# Altium PCB main board_PCB.PcbDoc
Units mm, origin at the board's own origin, x right, y up, seen from the top; angles counter-clockwise.
Board outline 130 x 45 mm, 2 copper layers (Top Layer, Bottom Layer); 83 components, 61 nets, 365 pads, 31 vias.
Unrouted connection lines stored in the file: 11.
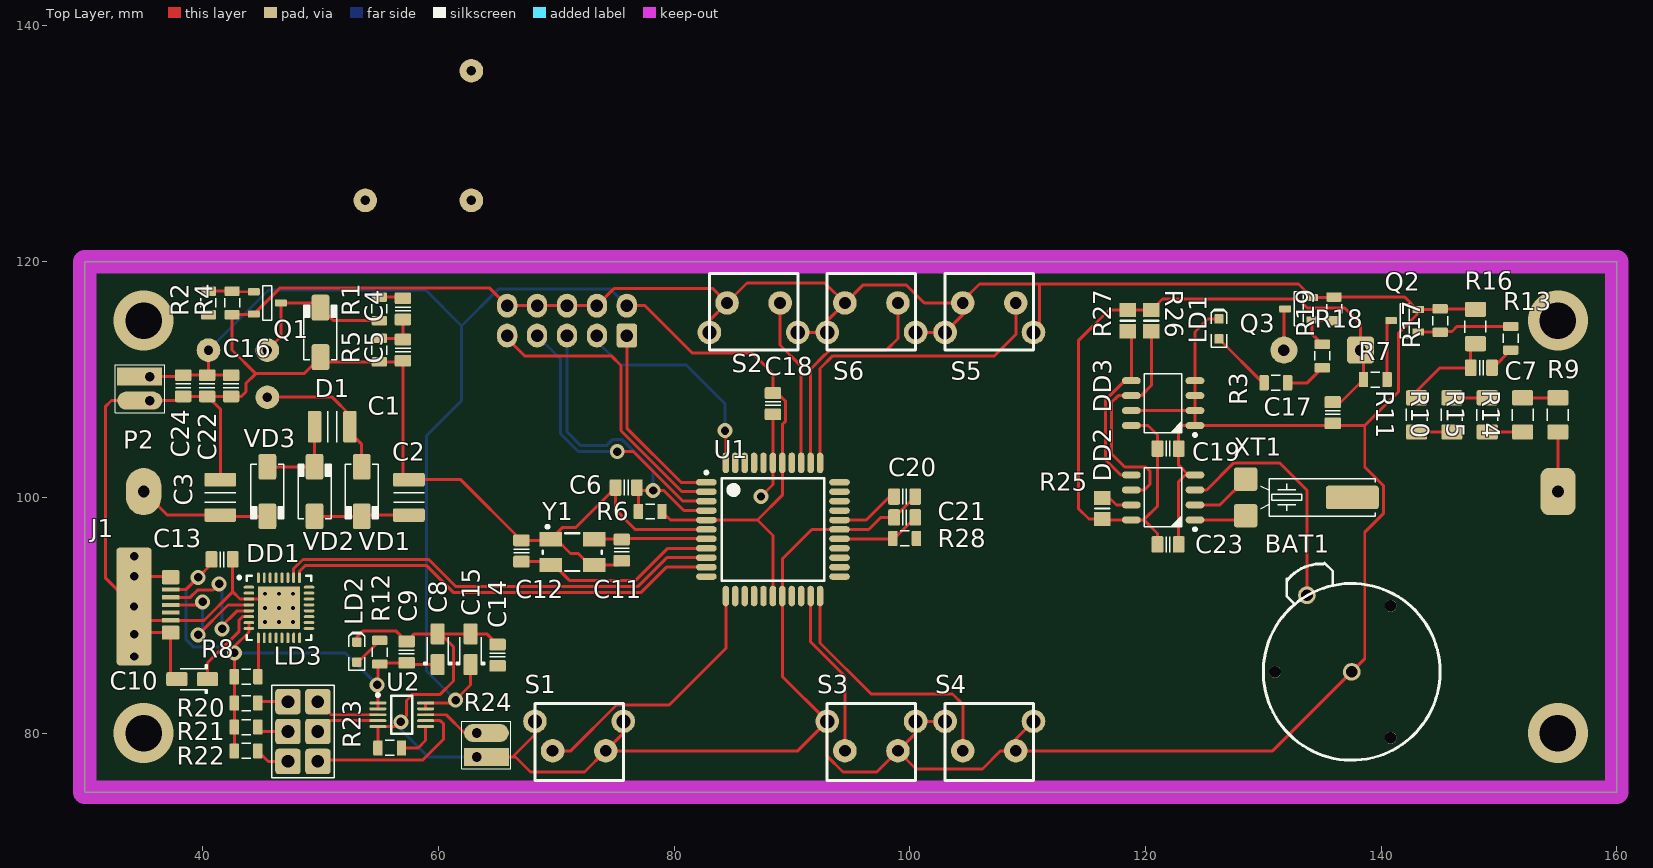
[diagram p0: Top Layer view]
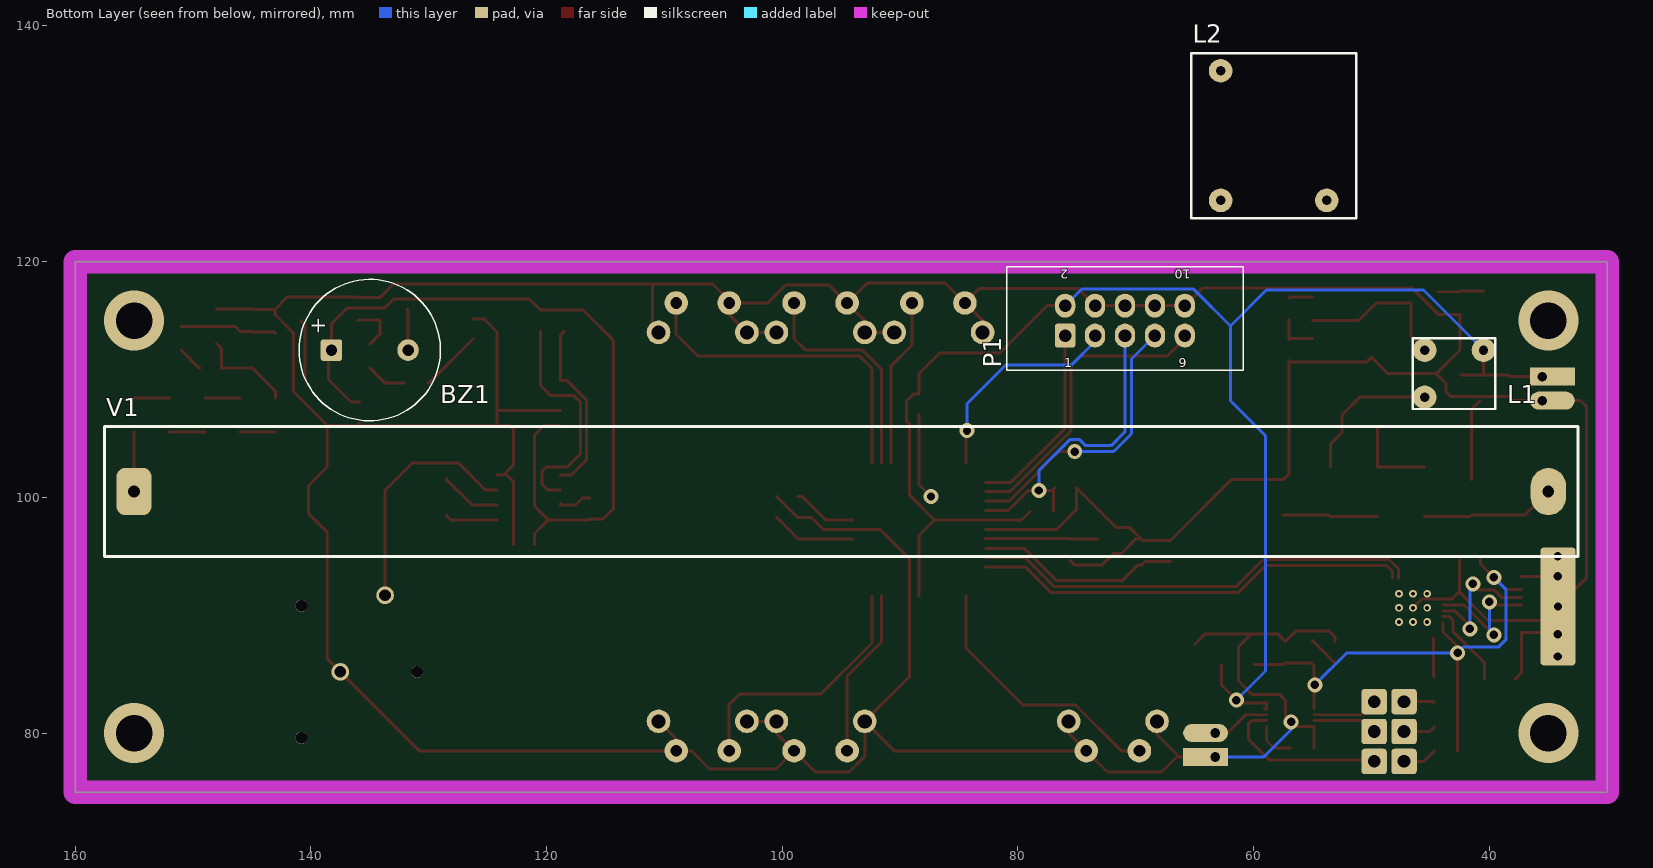
[diagram p1: Bottom Layer view, seen from below]
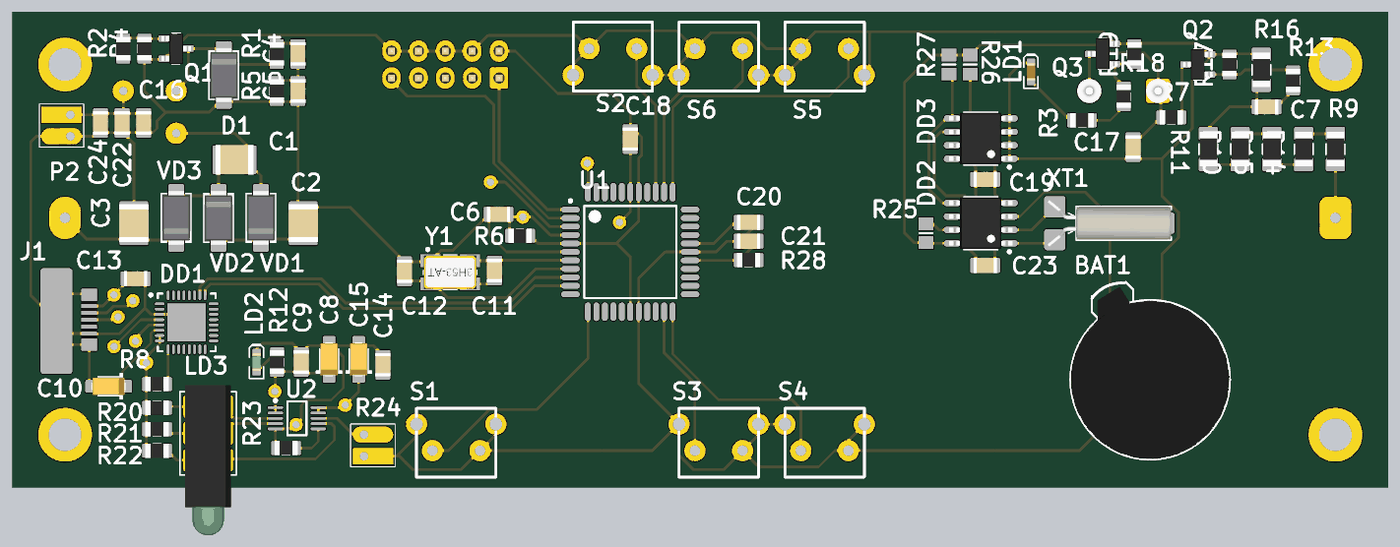
[diagram p2: 3D render of the assembled board from above, using the file's embedded part models]

## Layer stack, top to bottom
Top Solder: solder mask 0.0102, Solder Resist, Dk 3.5
Top Layer: signal copper 0.0356
Dielectric1: dielectric 0.32, FR-4, Dk 4.8
Bottom Layer: signal copper 0.0356
Bottom Solder: solder mask 0.0102, Solder Resist, Dk 3.5

## Board outline
30,75 30,120 160,120 160,75

## Design rules (kind name [scope] priority, off if disabled: settings)
Clearance [All] p1: gap=0.254
PolygonConnect [All] p1: connectstyle=Relief reliefconductorwidth=0.254 reliefentries=4 polygonreliefangle="90 Angle" airgapwidth=0.254
RoutingVias [All] p1: holewidth=0.711 width=1.27 viastyle="Through Hole" minholewidth=0.711 minwidth=1.27 maxholewidth=0.711 maxwidth=1.27
SilkToSolderMaskClearance SilkscreenOverComponentPads [IsPad] p1: minsilkscreentomaskgap=0.254 clearancetoexposedcopper=TRUE
SolderMaskExpansion [All] p1: expansion=0.102
Width [All] p1: maxlimit=0.254 minlimit=0.254 preferedwidth=0.254
29 further rules are at their usual default settings.

## Components (designator, comment, footprint, x,y, rotation, side; value= is the part's Value field where it differs from the comment)
BAT1 "CH23-1220LF" CH23-1220LF 137.5,85.2 r270 top
BZ1 "Alternate part: 3100-932" BUZZER_12.0X8.5MM 135,112.5 r180 bottom
C1 "C0805" CAPC3225X220N 51,106 r180 top
C2 "C0805" CAPC3225X220N 57.5,100 r90 top
C3 "C0805" CAPC3225X220N 41.5,100 r90 top
C4 "C0805" CAPC2012X135N 57,116 r90 top
C5 "C0805" CAPC2012X135N 57,112.5 r270 top
C6 "C0805" CAPC2012X135N 75.946,100.838 r180 top
C7 "C0805" CAPC2012X135N 148.5,111 r180 top
C8 "Cap Pol1" CAPMP3216X180N 59.944,87.122 r90 top
C9 "C0805" CAPC2012X135N 57.316,86.868 r270 top
C10 "Cap Pol1" CAPMP3216X180N 39.116,84.582 r180 top
C11 "C0805" CAPC2012X135N 75.566,95.529 r90 top
C12 "C0805" CAPC2012X135N 67.057,95.453 r270 top
C13 "C0805" CAPC2012X135N 41.656,94.742 r0 top
C14 "C0805" CAPC2012X135N 65.024,86.614 r270 top
C15 "Cap Pol1" CAPMP3216X180N 62.738,87.122 r90 top
C16 "C0805" CAPC2012X135N 42.418,109.474 r90 top
C17 "C0805" CAPC2012X135N 135.89,107.188 r90 top
C18 "C0805" CAPC2012X135N 88.392,107.95 r90 top
C19 "C0805" CAPC2012X135N 121.92,104.14 r180 top
C20 "C0805" CAPC2012X135N 99.568,100.076 r180 top
C21 "C0805" CAPC2012X135N 99.568,98.298 r0 top
C22 "C0805" CAPC2012X135N 40.386,109.474 r90 top
C23 "C0805" CAPC2012X135N 121.92,96.012 r180 top
C24 "C0805" CAPC2012X135N 38.354,109.474 r90 top
D1 "18V" DO-214AC 50,114 r90 top
DD1 "CP2102" 32-QFN_M 46.482,90.63 r0 top
DD2 "DS1307" SOIC127P600X175-8AN 121.5,100 r180 top
DD3 "AT24C02BN-SP25-B" SOIC127P600X175-8AN 121.5,108 r180 top
J1 "USB Micro Type B (recommended if hand soldering)" USB_micro_VTN 30.988,87.506 r0 top
L1 "HV_drossel" HV_drossel#1 49,113 r270 bottom
L2 "HV_drossel" HV_drossel#2 65.308,123.698 r180 bottom (schematic designator L1)
LD1 "PWR_H" LED-0603-RED 126.238,114.3 r90 top
LD2 "PWR_H" LED-0603-GREEN 53.086,86.868 r90 top
LD3 "Power status" LED_3-HIGH_3MM 48.514,73.152 r0 top
P1 "ISP/LCD" 10P_PCB_HEADER_BRD_MNT 70.92,115 r90 bottom
P2 "Bat" HDR1X2 35.5,110.5 r270 top
Q1 "BC817" SOT23-3 45.5,116.5 r0 top
Q2 "BC817" SOT23-3 142,115 r180 top
Q3 "BC817" SOT23-3 133,116 r180 top
R1 "Res2" RESC2012X70N 55,116 r270 top
R2 "Res2" RESC2012X70N 40.5,116.5 r90 top
R3 "Res2" RESC2012X70N 131.064,109.728 r0 top
R4 "Res2" RESC2012X70N 42.5,116.5 r90 top
R5 "Res2" RESC2012X70N 55,112.5 r90 top
R6 "Res2" RESC2012X70N 77.978,98.806 r180 top
R7 "Res2" RESC2012X70N 139.5,110 r180 top
R8 "Res2" RESC2012X70N 43.688,84.788 r180 top
R9 "Res2" RESC3216X70N 155,107 r270 top
R10 "Res2" RESC3216X70N 146,107 r270 top
R11 "Res2" RESC3216X70N 143,107 r270 top
R12 "Res2" RESC2012X70N 55.03,86.868 r270 top
R13 "Res2" RESC2012X70N 151,113.5 r90 top
R14 "Res2" RESC3216X70N 152,107 r90 top
R15 "Res2" RESC3216X70N 149,107 r90 top
R16 "Res2" RESC3216X70N 148,114.5 r270 top
R17 "Res2" RESC2012X70N 145,115 r270 top
R18 "Res2" RESC2012X70N 135,112 r90 top
R19 "Res2" RESC2012X70N 136,116 r270 top
R20 "Res2" RESC2012X70N 43.688,82.55 r0 top
R21 "Res2" RESC2012X70N 43.688,80.518 r0 top
R22 "Res2" RESC2012X70N 43.688,78.486 r0 top
R23 "Res2" RESC2012X70N 55.88,78.74 r0 top
R24 "Res2" HDR1X2 63.246,77.724 r90 top
R25 "Res2" 6-0805_N 116.332,99.06 r270 top
R26 "Res2" 6-0805_N 120.5,115 r90 top
R27 "Res2" 6-0805_N 118.5,115 r90 top
R28 "Res2" RESC2012X70N 99.568,96.52 r0 top
S1 "SW_THT_PB_7.0mm" KEY_L_F 68.2,76 r0 top
S2 "SW_THT_PB_7.0mm" KEY_L_F 90.5,119 r180 top
S3 "SW_THT_PB_7.0mm" KEY_L_F 93,76 r0 top
S4 "SW_THT_PB_7.0mm" KEY_L_F 103,76 r0 top
S5 "SW_THT_PB_7.0mm" KEY_L_F 110.5,119 r180 top
S6 "SW_THT_PB_7.0mm" KEY_L_F 100.5,119 r180 top
U1 "ATmega32A-AU" 44A_N 88.392,97.282 r0 top
U2 "MCP73833-AMI/UN" MSOP-UN10_L 56.896,81.559 r0 top
V1 "sbm20" sbm20 32.5,95 r90 bottom
VD1 "SF16" DO-214AC 53.5,100.5 r270 top
VD2 "SF16" DO-214AC 49.5,100.5 r90 top
VD3 "SF16" DO-214AC 45.5,100.5 r270 top
XT1 "32.768kHz" CRYSTAL_CMR309T 130.5,100 r180 top
Y1 "18.432MHz" 0532(MJ) 71.375,95.352 r180 top

## Footprints (in the part's own frame and the unit in brackets; to place one, negate y for a bottom-side part, rotate by r counter-clockwise, add the part's x,y. Pads: shape width x height; smd on the part's side, far side on the other; paste and mask are expansions set on the pad)
6-0805_N [mm] "Chip Resistor, Body 2.0x1.2mm, IPC Medium Density"
  rect 1.2x1.4 smd: 1(-0.9,0) 2(0.9,0)
  silkscreen extent 0,-0.6 0,0.6, body extent -1.07,-0.7 1.07,0.7, height 0.7
10P_PCB_HEADER_BRD_MNT [mil] "HEADER BRD MNT 10POS 2.54MM"
  round 40 on Mech15: 0(0,0)
  rrect25% 80x68 hole 42: 1(-50,200)
  oval 80x68 hole 42: 2(50,200) 3(-50,100) 4(50,100) 5(-50,0) 6(50,0) 7(-50,-100) 8(50,-100) 9(-50,-200) 10(50,-200)
  silkscreen extent -165,-395 180,395, body extent -162,-394 178,394, height 390
32-QFN_M [mm] "QFN, 32-Leads, Body 5x5mm, Pitch 0.5mm, IPC Low Density"
  oval 0.9x0.25 smd: 1(-2.55,1.75) 2(-2.55,1.25) 3(-2.55,0.75) 4(-2.55,0.25) 5(-2.55,-0.25) 6(-2.55,-0.75) 7(-2.55,-1.25) 8(-2.55,-1.75) 17(2.55,-1.75) 18(2.55,-1.25) 19(2.55,-0.75) 20(2.55,-0.25) 21(2.55,0.25) 22(2.55,0.75) 23(2.55,1.25) 24(2.55,1.75)
  oval 0.25x0.9 smd: 9(-1.75,-2.55) 10(-1.25,-2.55) 11(-0.75,-2.55) 12(-0.25,-2.55) 13(0.25,-2.55) 14(0.75,-2.55) 15(1.25,-2.55) 16(1.75,-2.55) 25(1.75,2.55) 26(1.25,2.55) 27(0.75,2.55) 28(0.25,2.55) 29(-0.25,2.55) 30(-0.75,2.55) 31(-1.25,2.55) 32(-1.75,2.55)
  rect 3.6x3.6 smd: 33(0,0)
  silkscreen extent -3.5,-2.73 2.73,2.73, body extent -2.58,-2.58 2.58,2.58, height 0.95
44A_N [mm] "Thin QFP, 44-Leads, Body 10x10mm, Pitch 0.8mm, IPC Medium Density"
  oval 1.75x0.55 smd: 1(-5.65,4) 2(-5.65,3.2) 3(-5.65,2.4) 4(-5.65,1.6) 5(-5.65,0.8) 6(-5.65,0) 7(-5.65,-0.8) 8(-5.65,-1.6) 9(-5.65,-2.4) 10(-5.65,-3.2) 11(-5.65,-4) 23(5.65,-4) 24(5.65,-3.2) 25(5.65,-2.4) 26(5.65,-1.6) 27(5.65,-0.8) 28(5.65,0) 29(5.65,0.8) 30(5.65,1.6) 31(5.65,2.4) 32(5.65,3.2) 33(5.65,4)
  oval 0.55x1.75 smd: 12(-4,-5.65) 13(-3.2,-5.65) 14(-2.4,-5.65) 15(-1.6,-5.65) 16(-0.8,-5.65) 17(0,-5.65) 18(0.8,-5.65) 19(1.6,-5.65) 20(2.4,-5.65) 21(3.2,-5.65) 22(4,-5.65) 34(4,5.65) 35(3.2,5.65) 36(2.4,5.65) 37(1.6,5.65) 38(0.8,5.65) 39(0,5.65) 40(-0.8,5.65) 41(-1.6,5.65) 42(-2.4,5.65) 43(-3.2,5.65) 44(-4,5.65)
  silkscreen extent -5.77,-4.35 4.35,4.95, body extent -5,-5 5,5, height 1.2
0532(MJ) [mm] "Surface Mount Quartz Crystal; Body 5.0 x 3.2 mm (LxW)"
  rect 1.9x1.2 smd: 1(1.85,-1.1) 2(-1.85,-1.1) 3(-1.85,1.1) 4(1.85,1.1)
  silkscreen extent -2.5,-2.28 2.5,1.6, body extent -2.5,-1.6 2.5,1.6, height 1.22
BUZZER_12.0X8.5MM [mil]
  round 20 on Mech15: 0(0,0)
  rrect25% 72x72 / inner rrect25% 72x72 / far side rrect25% 90x90 hole 38: 1(-127.95,0)
  round 72 / inner round 72 / far side round 90 hole 38: 2(127.95,0)
  silkscreen extent -236,-236 236,236, body extent -246,-246 246,246, height 354
CAPC2012X135N [mm] "Chip Capacitor, Body 2.0x1.2mm, EIA 0805, IPC Medium Density"
  round 0.254 on Mech15: 0(0,0)
  rrect25% 1x1.4 smd: 1(-0.9,0) 2(0.9,0)
  Top Layer pour cut-out: -0.675,0.7 -0.475,0.9 0.475,0.9 0.675,0.7 0.675,-0.7 0.475,-0.9 -0.475,-0.9 -0.675,-0.7
  silkscreen extent -0.15,-0.65 0.15,0.65, body extent -1.1,-0.72 1.1,0.73, height 1.34
CAPC3225X220N [mm] "Chip Capacitor, Body 3.2x2.5mm, EIA 1210, IPC Medium Density"
  round 0.508 on Mech15: 0(0,0)
  rrect25% 1.15x2.7 smd: 1(-1.5,0) 2(1.5,0)
  silkscreen extent -0.4,-1.3 0.4,1.3, body extent -1.8,-1.4 1.8,1.4, height 2.19
CAPMP3216X180N [mm] "Capacitor, polarized, Molded Body, EIA 535BAAC size A; 3.20mm L X 1.60mm W X 1.80mm H"
  round 0.508 on Mech15: 0(0,0)
  rrect25% 1.8x1.2 smd: 1(-1.3,0) 2(1.3,0)
  silkscreen extent -1.3,-1.2 1,1.2, body extent -1.6,-0.8 1.6,0.8, height 1.8
CH23-1220LF [mm] "1220 Battary holder"
  round 1.5 hole 1: 0(0,0) 1(-6.5,-3.8)
  round 1 hole 1: A(-5.6,3.3) A(0,-6.5) A(5.6,3.3)
  silkscreen extent -9.25,-7.5 7.5,7.5, body extent -8.81,-7.49 7.49,7.5, height 5.4
CRYSTAL_CMR309T [mm] "SMD Crystal CMR309T package"
  round 0.508 on Mech15: 0(0,0)
  rrect25% 2x2 smd: 1(2,-1.55) 2(2,1.55)
  rrect25% 4.5x2 smd: SH(-7.05,0)
  silkscreen extent -9,-1.6 0.72,1.6, body extent -9,-2.25 2.73,2.25, height 3.07
DO-214AC [mm] "JEDEC DO214 variation AC. SMA"
  round 0.508 on Mech15: 0(0,0)
  rrect25% 2.2x1.5 smd: A(-2.1,0) K(2.1,0)
  silkscreen extent -2.3,-1.4 2.3,1.4, body extent -2.6,-1.3 2.6,1.3, height 2.42
HDR1X2 [mil] "Connector; Header; 2 Position"
  rect 60x150 hole 32 copper offset 0,-33: 1(10,0)
  oval 60x150 hole 32 copper offset 0,-33: 2(90,0)
  silkscreen extent -30,-115 130,50
HV_drossel#1 [mm]
  round 2 hole 0.8: 1(0.5,3.5) 2(0.5,8.5) 3(4.5,3.5)
  silkscreen extent -0.5,2.5 5.5,9.5, body extent -0.5,2.5 5.5,9.5, height 5
HV_drossel#2 [mm]
  round 2 hole 0.8: 1(2.5,1.5) 2(2.5,12.5) 3(11.5,1.5)
  silkscreen extent 0,0 14,14, body extent 0,0 14,14, height 14
KEY_L_F [mm]
  round 2 hole 1: 1(1.5,2.5) 2(6,2.5)
  round 2 hole 1.2: 2(0,5) 2(7.5,5)
  silkscreen extent 0,0 7.5,6.5, body extent 0,-1 7.5,6.5, height 7.3
LED-0603-GREEN [mm]
  round 0.254 on Mech15: 0(0,0)
  rrect25% 0.8x0.8 smd: A(-0.85,0) K(0.85,0)
  Top Layer pour cut-out: -0.5,0.5 0.5,0.5 0.5,-0.5 -0.5,-0.5
  silkscreen extent -1.55,-0.67 1.68,0.67, body extent -0.8,-0.4 0.8,0.4, height 0.75
LED-0603-RED [mm]
  round 0.254 on Mech15: 0(0,0)
  rrect25% 0.8x0.8 smd: A(-0.85,0) K(0.85,0)
  Top Layer pour cut-out: -0.5,0.5 0.5,0.5 0.5,-0.5 -0.5,-0.5
  silkscreen extent -1.55,-0.67 1.68,0.67, body extent -0.8,-0.4 0.8,0.4, height 0.75
LED_3-HIGH_3MM [mil] "LED Circuit Board Indicator Tri-Level"
  round 20 on Mech15: 0(0,0)
  rrect25% 85x85 hole 42: A1(-50,375) A2(-50,275) A3(-50,175) K1(50,375) K2(50,275) K3(50,175)
  silkscreen extent -105,120 105,430, body extent -85,-105 85,455, height 600
MSOP-UN10_L [mm] "TSSOP, 10-Leads, Body 3x3mm, Pitch 0.5mm, IPC High Density"
  oval 1.45x0.25 smd: 1(-2.025,1) 2(-2.025,0.5) 3(-2.025,0) 4(-2.025,-0.5) 5(-2.025,-1) 6(2.025,-1) 7(2.025,-0.5) 8(2.025,0) 9(2.025,0.5) 10(2.025,1)
  silkscreen extent -2.15,-1.6 0.9,1.8, body extent -1.6,-1.6 1.6,1.6, height 1.1
RESC2012X70N [mm] "Chip Resistor, Body 2.0x1.2mm, EIA 0805, IPC Medium Density"
  round 0.254 on Mech15: 0(0,0)
  rrect25% 0.8x1.3 smd: 1(-1,0) 2(1,0)
  Top Layer pour cut-out: -0.725,0.65 -0.525,0.85 0.525,0.85 0.725,0.65 0.725,-0.65 0.525,-0.85 -0.525,-0.85 -0.725,-0.65
  silkscreen extent -0.38,-0.64 0.38,0.64, body extent -1.1,-0.67 1.1,0.68, height 0.69
RESC3216X70N [mm] "Chip Resistor, Body 3.2x1.6mm, EIA 1206, IPC Medium Density"
  round 0.508 on Mech15: 0(0,0)
  rrect25% 1.3x1.8 smd: 1(-1.45,0) 2(1.45,0)
  silkscreen extent -0.51,-0.89 0.51,0.89, body extent -1.62,-0.82 1.63,0.83, height 0.69
sbm20 [mm]
  oval 4x3 hole 1: 1(5.5,2.5)
  rrect50% 4x3 hole 1: 2(5.5,122.5)
  silkscreen extent 0,0 11,125, body extent 0.54,7.5 10.5,117.5, height 9.99
SOIC127P600X175-8AN [mm] "SOIC, 8-Leads, Body 4.9x3.9mm, Pitch 1.27mm, IPC Medium Density"
  round 1 on Mech15: 0(0,0)
  oval 1.6x0.6 smd: 1(-2.7,1.905) 2(-2.7,0.635) 3(-2.7,-0.635) 4(-2.7,-1.905) 5(2.7,-1.905) 6(2.7,-0.635) 7(2.7,0.635) 8(2.7,1.905)
  silkscreen extent -2.83,-2.5 1.6,2.82, body extent -3,-2.45 3,2.45, height 1.75
SOT23-3 [mm] "SOT23, 3 pin"
  round 0.5 on Mech15: 0(0,0)
  rrect25% 1x0.6 smd: 1(-1.15,0.95) 2(-1.15,-0.95) 3(1.15,0)
  silkscreen extent -0.38,-1.45 0.38,1.45, body extent -1.4,-1.45 1.4,1.45, height 1.29
USB_micro_VTN [mm]
  round 0.508 on Mech15: 0(0.7,3.369)
  rrect20% 1.5x0.35 smd: 1(6.3,4.669) 2(6.3,4.019) 3(6.3,3.369) 4(6.3,2.719) 5(6.3,2.069)
  rrect20% 3x10 smd: SH(3.196,3.243)
  rrect20% 3x10 smd far side: SH(3.196,3.243)
  rrect20% 1.5x1.2 smd: SH(6.3,1.019) SH(6.3,5.719)

## Part data
BAT1: "Battery holder"
BZ1: library part BZ_12x8.5x6.5_2kHz, "Speaker, Magnetic Transducer"
C1 C2 C3 C4 C5 C6 C7 C9 C11 C12 C13 C14 C16 C17 C18 C19 C20 C21 C22 C23 C24: "Ceramic Chip Capacitor - Standard"
C8 C10 C15: "Polarized Capacitor (Radial)"
D1: library part "D Zener", "Zener Diode"
DD3: "2Kbit (256 x 8), 2-wire Bus Automotive Serial EEPROM with full memory Write Protect, 2.5V, 8-Pin SOIC, Bulk"
J1: library part USB_Micro_TypeB_FCI, "Connector SMD-THD USB Micro Type B middle mount"
LD1 LD2: library part LED, "APT1608QBC/D"
LD3: library part LEDPACK_GREEN_3HIGH_3MM, "LED array PCB mount 3-high 3mm green"
P1: library part "Header 5X2", "Header, 5-Pin, Dual row"
P2: library part "Header 2", "Header, 2-Pin"
Q1 Q2 Q3: library part QNPN, "NPN Bipolar Transistor"
R1 R2 R3 R4 R5 R6 R7 R8 R9 R10 R11 R12 R13 R14 R15 R16 R17 R18 R19 R20 R21 R22 R23 R24 R25 R26 R27 R28: "Resistor"
S1 S2 S3 S4 S5 S6: "Switch, tact, 7.0mm stem"
U1: "8-bit AVR Microcontroller, 32KB Flash, 1KB EEPROM, 2KB SRAM, 44-pin TQFP, Industrial Grade (-40°C to 85°C)"
U2: "Stand-Alone Linear Li-Ion/Li-Polymer Charge Management Controller with Power-Good Output, 4.2V, 10-Pin MSOP, Industrial Temperature"
V1: library part K1.1
VD1 VD2 VD3: library part "Diode 1N4001", "1 Amp General Purpose Rectifier"
XT1: library part Crystal_6MHz_CMR309T, "Resonator Ceramic 6.00 MHz 30ppm"
Y1: library part Y_0532(MJ), "Crystal Oscillator"

## Via types
v1: diameter 1.27, hole 0.711, Top Layer to Bottom Layer, 18 vias
v2: diameter 0.66, hole 0.33, Top Layer to Bottom Layer, tented top, 9 vias
v3: diameter 5.08, hole 3.1, Top Layer to Bottom Layer, 4 vias

## Nets (pads, with @x,y where several pads share a name; then routed paths per layer and width w, separated by ;. In a path a pad name is that pad's centre, name@x,y a point inside that pad or via, vN(x,y) a via of type N, cw(c..) or ccw(c..) an arc to the next point about the centre after c; other vN are vias at no path point)
AREF: C20.2 U1.29 | length 5.5
  Top Layer w0.254: U1.29 96.304,98.082 98.298,100.076 C20.2
AVCC: C21.2 R28.1 U1.27 | length 7.2
  Top Layer w0.254: U1.27 98.53,96.482 R28.1 98.69,96.52 C21.2
BEEP_ON: R3.2 R18.1 U1.33 | length 3.5
  Top Layer w0.254: R3.2 133.728,109.728 R18.1
BUT1: S1.1 U1.12 | length 22.7
  Top Layer w0.254: S1.1 71.247,78.5 75.128,82.381 79.587,82.381 84.392,87.186 U1.12
BUT2: S2.1 U1.36 | length 14.3
  Top Layer w0.254: S2.1 89,112.93 90.792,111.138 U1.36
BUT3: S3.1 U1.21 | length 14.3
  Top Layer w0.254: U1.21 91.592,87.732 94.5,84.824 S3.1
BUT4: S4.1 U1.22 | length 22.2
  Top Layer w0.254: U1.22 92.392,87.65 96.73,83.312 103.632,83.312 104.5,82.444 S4.1
BUT5: S5.1 U1.34 | length 28.5
  Top Layer w0.254: U1.34 92.392,110.934 93.472,112.014 107.188,112.014 109,113.826 S5.1
BUT6: S6.1 U1.35 | length 19.5
  Top Layer w0.254: U1.35 91.592,110.896 92.837,112.141 ; 92.859,112.119 93.262,112.522 98.044,112.522 99,113.478 S6.1
CLOCK: DD2.7 R25.1 U1.42 | length 2.8
  Top Layer w0.254: R25.1 116.956,99.96 117.551,99.365 DD2.7 DD2.7@118.8,99.473
COUNT_IN: Q2.3 R7.1 U1.11 | length 5.1
  Top Layer w0.254: R7.1 140.5,114.65 Q2.3
FEEDBACK: C4.1 C5.1 R5.2 U1.37 | length 3.7
  Top Layer w0.254: R5.2 56.9,113.5 C5.1@57,113.6 ; C5.1 C5.1@57,113.6 ; C4.1 C5.1@57,113.6
GND: BAT1.0 C2.2 C3.2 C5.2 C6.2 C8.2 C9.1 C10.2 C11.1 C12.1 C13.2 C14.1 C15.2 C16.1 C17.1 C18.1 C19.1 C20.1 C21.1 C22.1 C23.1 C24.1 D1.A DD1.3 DD2.4 DD3.1 DD3.2 DD3.3 DD3.4 DD3.7 J1.5 J1.SH LD1.K LD2.K P1.4 P1.6 P1.8 P1.10 P2.2 Q1.2 Q2.2 Q3.2 R4.1 R5.1 R16.1 R17.1 R19.1 R23.1 R24.1 S1.2 S2.2 S3.2 S4.2 S5.2 S6.2 U1.6 U1.18 U1.28 U1.39 U2.5 Y1.1 Y1.3 | length 517.4
  Top Layer w0.254: v1(34.188,88.406) 34.307,88.525 37.288,88.525 37.288,85.11 C10.2 ; v1(34.188,93.306) 37.207,93.306 J1.SH@37.288,93.225 ; J1.5@37.288,89.553 40.115,89.553 42.556,91.994 ; J1.5 35.358,89.575 v1(34.184,90.749) 31.75,93.183 31.75,107.696 32.268,108.214 P2.2 37.994,108.214 C24.1 C22.1 C16.1 43.296,108.574 43.688,108.966 43.688,109.688 44.5,110.5 ; C22.1@40.786,108.214 41.5,107.5 C3.2 ; C13.2 42.556,91.994 ; 46.482,90.63 45.732,91.38 DD1.3 43.17,91.38 42.556,91.994 ; LD2.K 53.086,88.138 53.597,88.649 56.435,88.649 C9.1 57.97,88.422 C8.2 C8.2@60.193,88.422 ; R23.1 54.88,80.533 54.871,80.542 U2.5 56.404,80.559 57.302,81.458 57.302,82.779 57.785,83.261 60.122,83.261 61.29,84.43 61.29,87.325 C8.2@60.193,88.422 ; R24.1 66.294,77.978 ; C14.1 64.116,88.422 C15.2 C8.2@60.193,88.422 ; S1.2@68.2,81 68.2,79.884 66.294,77.978 ; C11.1 75.188,94.252 Y1.3 72.881,94.252 71.883,95.25 71.222,95.25 70.021,96.452 Y1.1 ; S1.2@75.7,81 75.7,80 S1.2@74.2,78.5 ; U1.6 76.708,97.282 75.046,98.944 C6.2 71.641,97.433 70.506,97.433 Y1.1 ; S2.2@83,114 83,115 S2.2@84.5,116.5 ; v1(87.376,100.076) 88.392,101.092 U1.39 C18.1 ; S2.2@90.5,114 93,114 93,115 S6.2@94.5,116.5 ; C20.1 98.69,98.298 C21.1 97.536,98.298 96.52,97.282 U1.28 91.694,97.282 89.192,94.78 U1.18 89.192,84.808 S3.2@93,81 ; S6.2@100.5,114 103,114 104.5,115.5 S5.2@104.5,116.5 ; S4.2@103,81 100.5,81 100.5,80 S3.2@99,78.5 ; S4.2@110.5,81 109,79.5 S4.2@109,78.5 ; S5.2@110.5,114 110.998,114.498 110.998,118.11 ; DD3.7 DD3.2 ; C23.1 122.82,101.346 123.379,101.905 DD2.4@123.647,101.905 ; DD2.4 DD2.4@123.647,101.905 ; LD1.K 125.31,115.15 124.2,114.04 DD3.4 DD3.3 DD3.2 ; R16.1 147.95,116 R17.1 144.95,115.95 Q2.2 Q2.2@143.05,115.95 ; 44.5,110.5 42.5,112.5 R4.1 44.3,115.5 Q1.2 46.581,117.781 64.329,117.781 P1.10 P1.8 P1.6 P1.4 74.93,117.74 83.26,117.74 S2.2@84.5,116.5 ; 44.5,110.5 48.6,110.5 D1.A 50.4,111.5 R5.1 56.9,111.5 C5.2 57,102 C2.2 61.91,101.5 C12.1 69.426,96.353 Y1.1 ; 66.294,77.978 66.548,77.978 67.818,76.708 72.408,76.708 S1.2@74.2,78.5 ; S1.2@74.2,78.5 90.5,78.5 S3.2@93,81 ; S2.2@84.5,116.5 86.2,118.2 92.8,118.2 S6.2@94.5,116.5 ; S3.2@93,81 93,78.047 94.339,76.708 97.208,76.708 S3.2@99,78.5 ; S6.2@94.5,116.5 96.012,118.012 99.724,118.012 101.236,116.5 S5.2@104.5,116.5 ; S3.2@99,78.5 100.538,76.962 106.172,76.962 107.71,78.5 S4.2@109,78.5 ; S5.2@104.5,116.5 104.5,116.692 105.918,118.11 110.998,118.11 ; S4.2@109,78.5 130.8,78.5 BAT1.0 138.607,86.307 138.607,97.045 140.181,98.619 140.181,101.011 138.607,102.585 138.607,106.095 ; 110.998,118.11 132.99,118.11 Q3.2 135.95,116.95 R19.1 142,117 Q2.2@143.05,115.95 ; DD2.4@123.647,101.905 122.82,102.732 C19.1 122.82,105.802 123.113,106.095 DD3.1 ; DD3.1 135.697,106.095 C17.1 136.083,106.095 138.607,106.095 ; DD3.1 DD3.2 ; 138.607,106.095 141.478,108.966 141.478,113.94 143.05,115.512 Q2.2@143.05,115.95
  Bottom Layer w0.254: v1(56.82,80.95) 56.82,80.315 59.157,77.978 R24.1
  other v1: 34.188,86.506 34.188,95.006
HV_+400V: C3.1 V1.1 VD3.K | length 11.4
  Top Layer w0.254: V1.1 37,98.5 C3.1 41.6,98.4 VD3.K
L_CLK: P1.7 U1.3 | length 23.9
  Top Layer w0.254: v1(75.184,103.886) 76.548,103.886 80.752,99.682 U1.3
  Bottom Layer w0.254: P1.7 70.358,111.752 70.358,105.41 71.882,103.886 v1(75.184,103.886)
L_CS: P1.3 U1.44 | length 18.6
  Top Layer w0.254: v1(84.328,105.664) 84.392,105.6 U1.44
  Bottom Layer w0.254: P1.3 73.46,113.23 75.438,111.252 81.026,111.252 84.328,107.95 v1(84.328,105.664)
L_DIN: P1.1 U1.1 | length 16.5
  Top Layer w0.254: P1.1 76,105.871 80.589,101.282 U1.1
NetBAT1_1: BAT1.1 DD2.3 | length 20.3
  Top Layer w0.254: DD2.3 125.193,100.635 127.489,102.931 131.369,102.931 133.7,100.6 BAT1.1
NetBZ1_2: BZ1.2 Q3.3 | length 3.5
  Top Layer w0.254: BZ1.2 131.75,115.9 Q3.3
NetC1_1: C1.1 L1.3 VD1.A | length 12.4
  Top Layer w0.254: L1.3 51,108.5 52.5,107 C1.1 52.5,105.5 53.5,104.5 VD1.A
NetC1_2: C1.2 VD2.K VD3.A | length 7.4
  Top Layer w0.254: VD3.A VD2.K C1.2
NetC2_1: C2.1 VD1.K VD2.A | length 8
  Top Layer w0.254: VD2.A VD1.K 53.6,98.5 C2.1
NetC4_2: C4.2 R1.1 | length 2
  Top Layer w0.254: R1.1 56.9,117 C4.2
NetC7_1: C7.1 R13.1 | length 2.2
  Top Layer w0.254: C7.1 149.5,111 R13.1
NetC7_2: C7.2 R11.1 R16.2 | length 8.2
  Top Layer w0.254: R11.1 143,109 145,111 C7.2 147.6,112.65 R16.2
NetC10_1: C10.1 DD1.6 | length 7.1
  Top Layer w0.254: C10.1 40.416,85.969 43.101,88.654 43.101,89.59 43.391,89.88 DD1.6
NetD1_2: D1.K L1.1 Q1.3 R1.2 | length 13.4
  Top Layer w0.254: L1.1 46.65,113.65 Q1.3 49.6,116.5 D1.K 51.1,115 R1.2
NetDD1_4: DD1.4 J1.3 | length 11.6
  Top Layer w0.254: J1.3 39.742,90.875 v1(40.005,91.138) ; v1@39.624,87.836 v1(39.624,88.344) 42.16,90.88 DD1.4
  Bottom Layer w0.254: v1(39.624,88.344) 40.005,88.725 v1(40.005,91.138)
NetDD1_5: DD1.5 J1.2 | length 11.7
  Top Layer w0.254: J1.2 38.955,91.525 39.584,92.154 40.894,92.154 v1(41.402,92.662) ; v1@41.402,88.852 42.93,90.38 DD1.5
  Bottom Layer w0.254: v1(41.402,92.662) 41.656,92.408 v1(41.656,88.852)
NetDD1_9: DD1.9 R8.1 | length 3.3
  Top Layer w0.254: R8.1 44.732,84.832 DD1.9
NetDD2_1: DD2.1 XT1.2 | length 4.4
  Top Layer w0.254: DD2.1 128.145,98.095 XT1.2
NetDD2_2: DD2.2 XT1.1 | length 5.2
  Top Layer w0.254: DD2.2 126.315,99.365 XT1.1
NetLD1_A: LD1.A R3.1 | length 5.4
  Top Layer w0.254: LD1.A 129.96,109.728 R3.1
NetLD2_A: LD2.A R12.1 | length 2.7
  Top Layer w0.254: LD2.A 53.18,86.018 R12.1
NetLD3_A1: LD3.A1 R20.2 | length 2.6
  Top Layer w0.254: R20.2 44.815,82.677 LD3.A1
NetLD3_A2: LD3.A2 R21.2 | length 2.7
  Top Layer w0.254: R21.2 45.069,80.137 LD3.A2
NetLD3_A3: LD3.A3 R22.2 | length 2.9
  Top Layer w0.254: R22.2 45.577,77.597 LD3.A3
NetLD3_K1: LD3.K1 U2.3 | length 5.5
  Top Layer w0.254: LD3.K1 50.902,81.559 U2.3
NetLD3_K2: LD3.K2 U2.4 | length 5.5
  Top Layer w0.254: LD3.K2 50.706,81.059 U2.4
NetLD3_K3: LD3.K3 U2.7 | length 14.4
  Top Layer w0.254: LD3.K3 49.896,77.709 58.659,77.709 60.452,79.502 60.452,80.772 60.165,81.059 U2.7
NetQ1_2: Q1.1 R2.2 R4.2 | length 3.9
  Top Layer w0.254: R2.2 R4.2 42.55,117.45 Q1.1
NetQ2_2: Q2.1 R13.2 R17.2 | length 8.3
  Top Layer w0.254: Q2.1@143,113.9 Q2.1 144.95,114.05 R17.2 145,114.081 146,114.081 146.419,114.5 R13.2
NetQ3_2: Q3.1 R18.2 R19.2 | length 4.3
  Top Layer w0.254: R18.2 134.15,113.85 Q3.1 135.95,115.05 R19.2
NetR9_1: R9.1 R14.2 | length 3
  Top Layer w0.254: R14.2 R9.1
NetR9_2: R9.2 V1.2 | length 5
  Top Layer w0.254: V1.2 R9.2
NetR10_1: R10.1 R15.2 | length 3
  Top Layer w0.254: R10.1 R15.2
NetR10_2: R10.2 R11.2 | length 3
  Top Layer w0.254: R11.2 R10.2
NetR14_1: R14.1 R15.1 | length 3
  Top Layer w0.254: R15.1 R14.1
NetR23_2: R23.2 U2.6 | length 3.5
  Top Layer w0.254: R23.2 58.293,78.74 58.921,79.368 U2.6@58.921,80.551 ; U2.6@58.917,80.555 U2.6
NetR24_2: R24.2 U2.8 | length 5
  Top Layer w0.254: U2.8 60.681,81.559 62.23,80.01 R24.2
PDO: P1.9 U1.2 | length 25.8
  Top Layer w0.254: P1.9 65.84,113.484 67.31,112.014 74.676,112.014 75.492,111.198 75.492,105.661 80.671,100.482 U1.2
PUMP_CONV: R2.1 U1.16
RES: C6.1 P1.5 R6.2 U1.4 | length 27.6
  Top Layer w0.254: C6.1 C6.1@76.978,100.706 ; R6.2 C6.1@76.978,100.706 ; U1.4 80.834,98.882 79.132,100.584 v1(78.232,100.584) 77.1,100.584 C6.1@76.978,100.706
  Bottom Layer w0.254: P1.5 70.92,105.566 72.092,104.394 74.255,104.394 74.763,104.902 75.605,104.902 78.232,102.275 v1(78.232,100.584)
RXD: DD1.26 U1.9 | length 38.1
  Top Layer w0.254: DD1.26 47.732,93.96 48.514,94.742 59.182,94.742 61.468,92.456 76.962,92.456 79.388,94.882 U1.9
SCL: DD2.6 DD3.6 R26.1 U1.19 | length 19.7
  Top Layer w0.254: DD2.6 119.898,100.635 120.406,101.143 120.406,102.202 120.022,102.586 118.244,102.586 117.104,103.726 117.104,108.044 117.695,108.635 DD3.6 119.635,108.635 120.5,109.5 R26.1
SDA: DD2.5 DD3.5 R27.1 U1.20 | length 15
  Top Layer w0.254: R27.1 118.8,113.8 118.8,111.853 DD3.5 118.247,109.905 116.596,108.254 116.596,103.218 117.909,101.905 DD2.5
TXD: DD1.25 U1.10 | length 37.1
  Top Layer w0.254: DD1.25@48.24,93.18 48.24,93.75 48.724,94.234 58.972,94.234 61.258,91.948 77.216,91.948 79.35,94.082 U1.10
VCC: BZ1.1 C14.2 C15.1 C16.2 C17.2 C18.2 C19.2 C22.2 C23.2 C24.2 DD2.8 DD3.8 L1.2 P1.2 P2.1 R6.1 R7.2 R25.2 R26.2 R27.2 R28.2 U1.5 U1.17 U1.38 U2.9 U2.10 | length 202.3
  Top Layer w0.254: P2.1 38.226,110.246 C24.2 C22.2 ; L1.2 40.5,110.488 C22.2 ; C16.2 C22.2 ; U2.9 U2.10 61.223,82.559 v1(61.468,82.804) 62.738,84.074 C15.1 ; U2.9@59.064,82.05 U2.9@59.064,82.059 ; P1.2 77.532,116.27 81.534,112.268 86.614,112.268 88.392,110.49 C18.2 ; R6.1 79.702,98.082 U1.5 87.084,98.082 ; U1.17 88.392,96.774 87.084,98.082 ; C18.2@88.392,108.768 88.844,108.768 89.473,108.139 89.473,106.465 89.192,106.184 U1.38 89.192,100.19 87.084,98.082 ; DD3.8 120.219,106.095 121.02,105.294 C19.2 121.02,99.26 119.855,98.095 ; C23.2 121.02,96.93 119.855,98.095 ; C17.2 136.588,108.088 R7.2 138.5,112.25 BZ1.1 138.25,114.734 136.906,116.078 133.727,116.078 132.965,116.84 121.44,116.84 R26.2 R27.2 116.916,115.9 114.3,113.284 114.3,99.06 115.2,98.16 R25.2 116.397,98.095 DD2.8 119.855,98.095
  Bottom Layer w0.254: L1.2 45.602,117.602 58.928,117.602 61.976,114.554 ; v1(61.468,82.804) 59,85.272 59,105.228 61.976,108.204 61.976,114.554 ; P1.2 74.603,117.667 65.089,117.667 61.976,114.554
VUSB: C8.1 C9.2 C13.1 DD1.7 DD1.8 J1.1 R8.2 R12.2 R20.1 R21.1 R22.1 U2.1 U2.2 | length 48.6
  Top Layer w0.254: J1.1 38.581,92.175 v1(39.624,93.218) 40.756,94.35 C13.1 ; R22.1 R21.1 R20.1 R8.2 v1(42.688,86.804) 42.688,87.344 43.932,88.588 DD1.8 DD1.7@43.932,89.374 ; U2.2@54.864,82.05 U2.2@54.864,82.059 ; U2.2 U2.1 54.871,85.709 R12.2 55.13,85.968 C9.2 57.462,85.822 C8.1
  Bottom Layer w0.254: v1(39.624,93.218) 38.608,92.202 38.608,87.923 39.203,87.328 42.164,87.328 v1(42.688,86.804) 52.109,86.804 v1(54.813,84.099)
XTL1: C12.2 U1.8 Y1.4 | length 17.5
  Top Layer w0.254: C12.2 69.223,94.553 Y1.4 69.832,94.252 71.12,92.964 76.752,92.964 79.47,95.682 U1.8
XTL2: C11.2 U1.7 Y1.2 | length 9.5
  Top Layer w0.254: Y1.2 75.544,96.452 C11.2 ; C11.2@75.566,96.506 82.718,96.506 U1.7
pads on no net: BAT1.A BZ1.0 C1.0 C2.0 C3.0 C4.0 C5.0 C6.0 C7.0 C8.0 C9.0 C10.0 C11.0 C12.0 C13.0 C14.0 C15.0 C16.0 C17.0 C18.0 C19.0 C20.0 C21.0 C22.0 C23.0 C24.0 D1.0 DD1.1 DD1.2 DD1.10 DD1.11 DD1.12 DD1.13 DD1.14 DD1.15 DD1.16 DD1.17 DD1.18 DD1.19 DD1.20 DD1.21 DD1.22 DD1.23 DD1.24 DD1.27 DD1.28 DD1.29 DD1.30 DD1.31 DD1.32 DD1.33 DD2.0 DD3.0 J1.0 J1.4 L2.1 L2.2 L2.3 LD1.0 LD2.0 LD3.0 P1.0 Q1.0 Q2.0 Q3.0 R1.0 R2.0 R3.0 R4.0 R5.0 R6.0 R7.0 R8.0 R9.0 R10.0 R11.0 R12.0 R13.0 R14.0 R15.0 R16.0 R17.0 R18.0 R19.0 R20.0 R21.0 R22.0 R23.0 R28.0 U1.13 U1.14 U1.15 U1.23 U1.24 U1.25 U1.26 U1.30 U1.31 U1.32 U1.40 U1.41 U1.43 VD1.0 VD2.0 VD3.0 XT1.0 XT1.SH
copper on no net:
  other v2: 45.282,89.43 46.482,89.43 47.682,89.43 45.282,90.63 46.482,90.63 47.682,90.63 45.282,91.83 46.482,91.83 47.682,91.83
  other v3: 35,80 155,80 35,115 155,115

## Keep-outs
Keep-Out Layer:
  the board outline again, w2

## Text inside footprints (layer, text, board x,y; h text height)
BZ1: Bottom Overlay "+" at 138.3,113.8 h2.29 r270
P1: Bottom Overlay "9" at 66.373,111.063 h0.76; Bottom Overlay "10" at 65.325,119.318 h0.76 r180; Bottom Overlay "1" at 76.091,111.063 h0.76; Bottom Overlay "2" at 75.746,119.318 h0.76 r180